# Altium PCB PCB1.PcbDoc (part 3 of 3)
Units mm, origin at the board's own origin, x right, y up, seen from the top; angles counter-clockwise.
Board outline 80 x 55 mm, 4 copper layers (Top Layer, Inner Layer 1, Inner Layer 2, Bottom Layer 1), stack 0.603 mm thick; 136 components, 94 nets, 499 pads, 245 vias.
Unrouted connection lines stored in the file: 1.
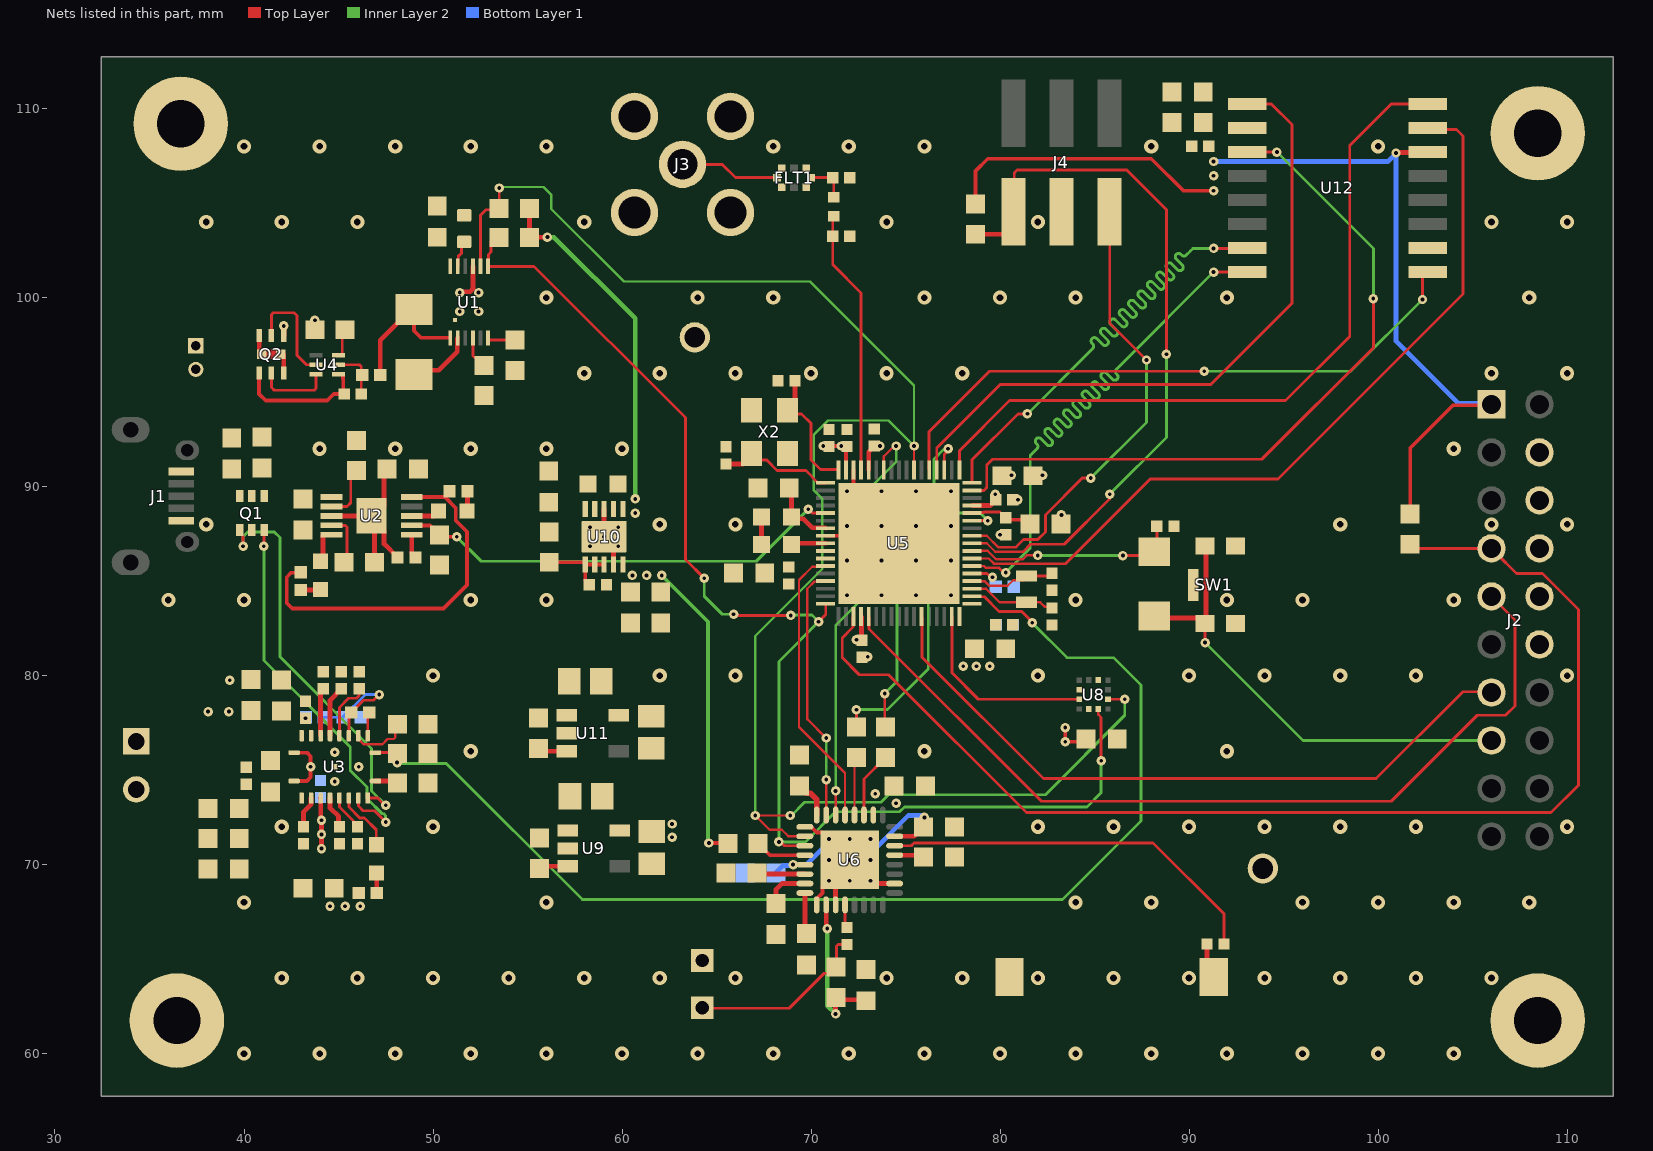
[diagram p4: the nets of this part, all layers, seen from the top]

## Part data (continued)
R22 R29: library part CMP-009-00149-12, "Chip Resistor, 10 kOhms, +/-1 %, 63 mW, -55 to 125 degC, 0402", Case/Package=0402, Max Operating Temperature=155°C, Min Operating Temperature=-55°C, Power=63mW, Tolerance=1%, Mfr. Part No.=CRCW040210K0FKTD, Pins=2
R24: library part CMP-009-00006-3, "SMD Resistor, Thick film 2.2 kOhm,  ±  1 %, 0603, CRCW06032K20FKEA, Vishay", Case Code (Imperial)=0603, Case Code (Metric)=1608, Max Operating Temperature=155°C, Max Power Dissipation=100mW, Min Operating Temperature=-55°C, Package Quantity=10, Resistance=2.2kR, Resistance Tolerance=1%, Resistor Type="Thick Film", Temperature Coefficient=100ppm/°C, Voltage Rating=75V, Case/Package=0603, Construction=Rectangular, Contact Plating=Tin, Depth=0.85mm, Features="Automotive AEC-Q200", Height=0.45mm, Lead Free="Lead Free", Length=1.55mm, Mfr. Part No.=CRCW06032K20FKEA, Military Standard=Not, Mount="Surface Mount", Number of Terminations=2, Packaging="Tape and Reel", Power Rating=100mW, Radiation Hardening=No, REACH SVHC=Unknown, RoHS Compliant=Yes, Series=CRCW, Size Code=0603, Technology="THICK FILM", Termination=SMD/SMT, Tolerance=1%, Voltage Rating (DC)=75V, Weight=7.1E-05oz, Width=0.033inch
R27: library part CMP-009-00191-7, "VISHAY - CRCW060320K0FKEA - SMD Chip Resistor, 0603 [1608 Metric], 20 kohm, CRCW e3 Series, 75 V, Thick Film, 100 mW", Case Code (Imperial)=0603, Case Code (Metric)=1608, Max Operating Temperature=155°C, Max Power Dissipation=100mW, Min Operating Temperature=-55°C, Package Quantity=5000, Resistance=20k, Resistance Tolerance=1%, Resistor Type="Thick Film", Temperature Coefficient=100ppm/°C, Voltage Rating=75V, Case/Package=0603, Construction=Rectangular, Contact Plating=Tin,Lead, Depth=0.85mm, Features="Automotive AEC-Q200", Height=0.45mm, Lead Free="Lead Free", Length=1.55mm, Military Standard=Not, Mount="Surface Mount", Number of Pins=2, Number of Terminations=2, Packaging="Tape and Reel", Power Rating=100mW, Radiation Hardening=No, REACH SVHC=Unknown, RoHS Compliant=Yes, Series=CRCW, Size Code=0603, Termination=SMD/SMT, Tolerance=1%, Voltage Rating (DC)=75V, Weight=7.1E-05oz, Width=0.85mm
ST1 ST2 ST3 ST4: library part CMP-00028-00004-1, "M2 PTH (2.5mm), 5mm pad", Pins=1
SW1: library part CMP-011-00013-2, "Switch Tactile N.O. SPST Button Gull Wing 0.05A 32VDC 1VA 150000Cycles 3N SMD T/R", Case/Package=SMD/SMT, Contact Current Rating=50mA, Contact Resistance=100mR, Insulation Resistance=1GR, Max Operating Temperature=85°C, Max Voltage Rating (DC)=32V, Min Operating Temperature=-40°C, Operating Force=3N, Package Quantity=7000, Power Rating=1W, Actuator Length=0.5mm, Actuator Type=Standard, Contact Material=Silver, Contact Plating=Silver, Current Rating=50mA, Depth=4.6mm, Illumination Type=Non-Illuminated,Illuminated, Lead Free="Lead Free", Length=4.6mm, Max Current Rating=50mA, Mechanical Life=150000Cycles, Mount="Surface Mount", Orientation=Straight, Packaging="Cut Tape", Radiation Hardening=No, REACH SVHC="No SVHC", Series=KMR2, Switch Function=Off-Mom, Switch Travel=0.25mm, Termination="Gull Wing", Throw Configuration=SPST, Voltage Rating (DC)=32V, Width=2.8mm
U1: library part CMP-019-00060-3, "IC BATT FUEL GAUGE LICOO2 12SON", Capacity=8000mAh, Max Operating Temperature=85°C, Max Supply Voltage=4.5V, Min Operating Temperature=-40°C, Min Supply Voltage=2.45V, Operating Supply Current=93uA, Output Current=500uA, Output Voltage=1.8V, Package Quantity=250, Contact Plating=Gold, Interface=I2C, Lead Free="Lead Free", Mount="Surface Mount", Number of Cells=1, Number of Pins=12, Packaging="Tape and Reel", REACH SVHC="No SVHC", RoHS Compliant=Yes
U2: library part CMP-019-00058-5, "Battery Charger Li-Ion/Li-Pol 1000mA 4.2V 10-Pin MSOP EP T/R", Case/Package=MSOP, Max Charge Current=1A, Max Operating Temperature=125°C, Max Output Voltage=4.23V, Max Supply Voltage=12V, Min Input Voltage=4.5V, Min Operating Temperature=-40°C, Min Output Voltage=4.16V, Min Supply Voltage=3.5V, Operating Supply Current=800uA, Operating Supply Voltage=6.5V, Output Voltage=4.2V, Package Quantity=1, Contact Plating=Gold, Height=0.95mm, Lead Free="Lead Free", Length=3.1mm, Max Output Current=1A, Mfr. Part No.=BQ24092DGQT, Number of Cells=1, Number of Pins=10, Output Current=1A, Packaging="Tape and Reel", Radiation Hardening=No, REACH SVHC="No SVHC", RoHS Compliant=Yes, Series=-, Width=3.1mm
U3: library part CMP-019-00057-4, "IC WIRELESS PWR RCVR 20QFN", Case/Package=VQFN, Max Operating Temperature=125°C, Min Operating Temperature=0°C, Operating Supply Current=8mA, Operating Supply Voltage=10V, Output Current=1.5A, Output Voltage=4.35V, Package Quantity=3000, Contact Plating=Gold, Lead Free="Lead Free", Logic Function=Receiver, Mount="Surface Mount", Packaging="Tape and Reel", RoHS Compliant=Yes, Series=BQ51051B
U4: library part CMP-019-00059-3, "IC LITHIUM BATT PROTECT 6WSON", Case/Package=WFDFN, Max Operating Temperature=85°C, Min Operating Temperature=-40°C, Operating Supply Voltage=28V, Contact Plating=Gold, Fault Protection="Over Current,Short Circuit,Over/Under Voltage", Lead Free="Lead Free", Mount="Surface Mount", Number of Cells=1, Number of Pins=6, Packaging="Tape and Reel", RoHS Compliant=Yes
U5: library part CMP-020-00023-6, "ARM Based Multiprotocol Wireless Microcontroller 32-Bit 1.71V to 3.6V 68-Pin 256KB VFQFPN Surface Mount", Case/Package=VFQFPN, Frequence=64MHz, Manufacturer=ST, Max Operating Temperature=85°C, Max Supply Voltage=3.6V, Min Operating Temperature=-40°C, Min Supply Voltage=1.71V, Flash size=256kB
U6: library part CMP-001-0002-4, "MAX9867 Series 1.8V I2C/Serial Ultra-Low Power Stereo Audio Codec - TQFN-32EP", Max Operating Temperature=85°C, Min Operating Temperature=-40°C, Operating Supply Voltage=1.8V, Package Quantity=60, Interface=I2C,Serial, Mfr. Part No.=MAX9867ETJ+G3U, Mount="Surface Mount", Number of D/A Converters=2, Number of Pins=32, Packaging=Rail/Tube, Resolution=18b, RoHS Compliant=Yes, Sampling Rate=48KS/s, Signal to Noise Ratio (SNR)=85dB, Type="General Purpose"
U7: library part CMP-00027-00002-3, "Microphones 2.2K OHM 9.7mm", Current Rating=500uA, Max Supply Voltage=1.5V, Max Supply Voltage (DC)=10V, Package Quantity=100, Depth=4.5mm, Diameter=9.7mm, Direction=Omnidirectional, Height=4.7mm, Impedance=2.2kR, Length=9.7mm, Mount=Wire, Nominal Supply Voltage (DC)=1.5V, Operating Supply Current=500uA, Output Impedance=2.2kR, Output Type=Analog, Packaging=Bulk, REACH SVHC="No SVHC", RoHS Compliant=Yes, Series=AOM, Shape=Circular,Round, Termination="PC Pins", Voltage Rating=10V, Width=9.7mm
U8: library part CMP-00002-2, "3-AXIS Iomt Accelerometer (1.6X1", Case/Package=VLGA-12, Manufacturer=MEMSIC, Acceleration="2g, 4g, 8g, 12g, 16g", Interface Type=I2C, Mfr. Part No.=MC3413, Sensing Axis=X,Y,Z, Type=Accelerometer
U9 U11: library part CMP-019-00061-2, "Automotive, 300-mA, low-IQ, high-PSRR, LDO voltage regulator with high accuracy and enable 5-SOT-23 -40 to 150", Case/Package=SOT-23, Dropout voltage=115mV, Manufacturer="Texas Instruments", Max Output Current=300mA, Output Voltage=1.8V, Mfr. Part No.=TPS78418QDBVRQ1
U10: library part CMP-019-00064-1, "TEXAS INSTRUMENTS         TPS63001DRCR             CONVERTER, BUCK-BOOST, SON-10, FULL REEL", Max Input Voltage=5.5V, Max Operating Temperature=85°C, Max Output Current=1.2A, Max Output Voltage=3.3V, Min Input Voltage=1.8V, Min Operating Temperature=-40°C, Package Quantity=1, Quiescent Current=30uA, Switching Frequency=1.5MHz, Contact Plating=Gold, Efficiency=96%, Lead Free="Lead Free", Mfr. Part No.=TPS63001DRCR, Min Output Voltage=3.3V, Nominal Output Voltage=3.3V, Number of Outputs=1, Number of Pins=10, Operating Supply Voltage=5.5V, Output Current=1.2A, Output Type=Fixed, Output Voltage=3.3V, Packaging="Tape and Reel", Radiation Hardening=No, REACH SVHC="No SVHC", Synchronous Rectifier=Yes, Topology=Buck-Boost, Weight=0.000921oz
U12: library part CMP-019-00062-1, "128-MBIT Cmos 3.0 Volt Flash Memory With 80MHZ Ddr Spi (ser", Case/Package=SOIC, Frequency=80MHz, Max Operating Temperature=105°C, Mfr. Part No.=S25FL128SDSMFV001, Min Operating Temperature=-40°C, Interface=SPI,Serial, Memory Type=FLASH,NOR, Packaging=Tray, RoHS Compliant=Yes
X1: library part CMP-003-00032-3, "CRYSTAL 32.7680KHZ 7PF SMD", Case/Package=SMD/SMT, ESR (Equivalent Series Resistance)=90kR, Frequency=32.768kHz, Frequency Stability=20ppm, Load Capacitance=7pF, Max Operating Temperature=85°C, Min Operating Temperature=-40°C, Package Quantity=3000, Frequency Tolerance=20ppm, Height=0.024inch, Lead Pitch=0.8mm, Length=0.079inch, Mount="Surface Mount", Number of Pins=2, Packaging="Tape and Reel", RoHS Compliant=Yes, Series=ECX-12, Termination=SMD/SMT, Width=0.047inch
X2: library part CMP-003-00031-3, "Crystal 32MHz ±7ppm (Tol) ±10ppm (Stability) 8pF FUND 40Ohm 4-Pin Mini-CSMD T/R", Case/Package=3.2x2.5x0.8mm, Freqeuncy Tolerance=10ppm, Frequency=32MHz, Load Capacitance=8pF, Manufaturer=ECS, Max Operating Temperature=-20°C, Min Operating Temperature=70°C, Tolerance=7ppm, Drive Level=200uW, ESR=40

## Via types
v1: diameter 0.75, hole 0.35, Top Layer to Bottom Layer 1, 116 vias
v2: diameter 0.5, hole 0.2, Top Layer to Bottom Layer 1, 95 vias
v3: diameter 0.5/0.5/0.5/0.5 (per signal layer), hole 0.2, Top Layer to Bottom Layer 1, 34 vias

## Nets (pads, with @x,y where several pads share a name; then routed paths per layer and width w, separated by ;. In a path a pad name is that pad's centre, name@x,y a point inside that pad or via, vN(x,y) a via of type N, cw(c..) or ccw(c..) an arc to the next point about the centre after c; other vN are vias at no path point)
1V8_A: C43.1 C44.1 C49.1 U6.5 U6.23 U9.5 | length 12.1
  Top Layer w0.2: v2(69.05,70) U6.5@69.675,70
  Top Layer w0.25: U6.23@74.425,71.5 75.45,71.5 75.9,71.95 C43.1@75.9,72 ; C43.1@75.95,72 76,72.05 v2(76,72.5)
  Bottom Layer 1 w0.25: C44.1@68.05,69.5 68.499,69.949 68.999,69.949 v2(69.05,70) 69.75,70 70.6,70.85 73.4,70.85 75.15,72.6 75.9,72.6 v2(76,72.5)
  other v3: 62.65,71.45 62.65,72.15
1V8_D: C42.1 C54.1 U6.32 U11.5 | length 2.1
  Top Layer w0.3: C42.1@69.55,74.25 69.55,74 69.775,73.775 69.975,73.775 70.3,73.45 U6.32@70.3,72.625
3V3_MCU: C19.1 C20.1 C21.1 C22.1 C23.1 C24.1 C25.1 C26.1 C28.1 C29.1 C30.1 C45.1 C47.1 C51.2 C52.2 C58.1 C59.1 C60.1 J2.1 R1.2 R2.2 R20.2 R21.2 R30.1 U5.1 U5.14 U5.30 U5.33 U5.44 U5.45 U5.55 U5.68 U6.26 U8.3 U10.1 U10.10 U12.2 U12.14 | length 94.9
  Top Layer w0.2: v2(64.595,71.144) 65.582,71.144 R20.2@65.6,71.126 ; v3(70.65,92.15) v3(71.6,92.15) C25.1@71.65,92.15 ; U5.33@71.85,90.875 C25.1@71.85,92.05 ; R30.1@78.65,104.9 R30.1@78.7,104.95 78.7,106.7 79.35,107.35 88,107.35 89.7,105.65 v3(91.3,105.65) ; v3(83.45,77.25) v3(83.45,76.5) 84.4,76.5 C47.1@84.5,76.6 ; R21.2@101.7,88.55 101.7,92.05 103.95,94.3 105.9,94.3 J2.1@105.95,94.35
  Top Layer w0.25: R1.2@55.1,104.721 55.1,103.2 v2(56.05,103.2) ; U5.55@72.65,83.125 72.675,83.1 72.675,81.875 C30.1@72.7,81.85 ; U5.30@73.05,90.875 73.05,91.85 C20.1@73.35,92.15 ; U5.14@78.525,89 79.475,89 C29.1@79.775,89.3 79.763,89.313 79.763,89.587 v3(79.75,89.6) ; v2(100.95,107.65) 100.977,107.677 102.577,107.677 U12.14@102.6,107.7
  Inner Layer 2 w0.2: v3(62.1,85.3) 64.55,82.85 64.55,71.189 v2(64.595,71.144)
  Inner Layer 2 w0.25: v2(56.05,103.2) 56.4,103.2 60.7,98.9 v3(60.7,89.35)
  Bottom Layer 1 w0.2: v3@91.25,105.65 v3(91.3,105.65)
  Bottom Layer 1 w0.25: v3(91.3,107.2) 100.5,107.2 v2(100.95,107.65) 100.95,97.7 104.25,94.4 J2.1@105.85,94.4
  other v3: 74.5,73.25 73.4,73.75 78.05,80.5 78.75,80.5 79.45,80.5 72.4,81.9 60.55,85.3 61.3,85.3 60.7,88.6 80.6,90.6 73.65,92.15 91.3,106.45
5V_IN: C1.1 Q1.4 U2.1
AC1: C7.1 C13.1 C15.1 C61.2 C62.2 C63.2 C64.1 C65.1 U3.2
AC2: C16.1 C17.1 C18.1 C64.2 C65.2 P2.1 U3.19
BAT: C2.1 C11.1 C12.1 C48.1 C50.2 C53.1 R5.1 R6.2 R7.2 R8.2 R17.2 R23.1 R25.1 U1.8 U2.10 U3.4 U9.1 U10.5 U11.1 | length 25.7
  Top Layer w0.2: R5.1@42.999,85.475 42.966,85.441 42.491,85.441 42.258,85.208 42.258,83.842 42.55,83.55 50.55,83.55 51.8,84.8 51.8,87.615 51.197,88.217 51.197,88.883 50.63,89.45 U2.10@48.95,89.45
  Top Layer w0.25: v2@44.05,72.3 44.055,72.305 44.055,73.52 U3.4@44.05,73.525 ; v2(44.1,70.85) 44.1,71.55 v2@44.15,71.6 ; v2(44.1,71.6) v2(44.1,72.35) ; R6.2@48.85,95.85 49.15,96.15 50.3,96.15 51.286,97.136 51.286,97.846 U1.8@51.311,97.871
  other v2: 44.55,67.8 45.35,67.8 46.15,67.8
BAT+: C4.1 P1.1 R6.1 R11.2 U1.6 U1.7 | length 7.3
  Top Layer w0.2: R6.1@49,99.3 49,98.25 49.379,97.871 U1.7@50.911,97.871
  Top Layer w0.25: R11.2@47.21,95.9 47.21,97.75 R6.1@48.76,99.3
  Top Layer w0.5: R6.1@48.76,99.3 R6.1@48.9,99.3
BAT-: C14.2 P1.2 Q2.4 U4.4 | length 7.2
  Top Layer w0.2: Q2.4@40.8,96 40.8,94.9 41.15,94.55 44.4,94.55 44.75,94.9 C14.2@45.25,94.9 ; U4.4@44.995,95.95 45.22,95.95 45.245,95.925 45.245,95.705 45.25,95.7 C14.2@45.25,94.9 ; C14.2@45.3,94.9 C14.2@45.25,94.9
BL_RF: C56.1 L4.1 U5.31 | length 14.1
  Top Layer w0.15: L4.1@71.2,104.35 71.15,104.3 C56.1@71.15,103.25 71.15,101.75 72.65,100.25 U5.31@72.65,90.875
BOOT1: C7.2 U3.3 | length 1.7
  Top Layer w0.25: C7.2@43.15,72 43.15,72.8 43.55,73.2 U3.3@43.55,73.525
BOOT2: C16.2 U3.17 | length 2.6
  Top Layer w0.25: U3.17@44.05,76.825 44.05,79.125 44.175,79.25 C16.2@44.25,79.25
CHG_CTRL: R27.2 U3.13 | length 3.2
  Top Layer w0.125: U3.13@46.05,76.825 46.05,76.645 46.333,76.362 47.312,76.362 47.6,76.65 47.927,76.65 48,76.723 R27.2@48,77.45 ; R27.2@48.125,77.425 R27.2@48.15,77.45
CHG_EN: R26.2 U3.11 U5.2 | length 63.4
  Top Layer w0.15: U3.11@46.95,75.925 47.975,75.925 R26.2@48.1,75.8 ; U5.2@78.525,84.2 78.55,84.175 79.175,84.175 79.95,83.4 81.15,83.4 81.7,82.85 v2(81.7,82.8)
  Inner Layer 2 w0.15: v2(48.1,75.4) 48.15,75.35 50.7,75.35 57.9,68.15 83.3,68.15 87.45,72.3 87.45,79.5 86,80.95 83.55,80.95 v2(81.7,82.8)
CHG_ON: DS3.2 U2.8 | length 1.5
  Top Layer w0.25: U2.8@48.875,88.45 50.05,88.45 DS3.2@50.3,88.7
CLMP1: C15.2 U3.5 | length 1.7
  Top Layer w0.25: U3.5@44.55,73.525 44.555,73.52 44.555,72.995 45,72.55 45,72.05 C15.2@45.051,72
CLMP2: C18.2 U3.16 | length 2.7
  Top Layer w0.25: U3.16@44.55,76.825 44.55,78.7 C18.2@45.151,79.3
CODEC_INTN: R20.1 U6.4 | length 2.8
  Top Layer w0.2: R20.1@67.15,71.2 67.15,71.176 R20.1@67.2,71.126 67.826,70.5 U6.4@69.675,70.5
COM1: C13.2 U3.6 | length 1.9
  Top Layer w0.15: U3.6@45.05,73.525 45.055,73.52 45.055,73.045 45.826,72.274 45.826,72.074 C13.2@45.9,72
COM2: C17.2 U3.15 | length 3.2
  Top Layer w0.15: U3.15@45.05,76.825 45.05,78.323 45.528,78.8 45.95,78.8 46.1,78.95 C17.2@46.101,79.3 C17.2@46.15,79.35
COUT: Q2.2 U4.2 | length 5.9
  Top Layer w0.15: Q2.2@41.45,98 41.45,99.1 41.55,99.2 42.65,99.2 42.8,99.05 42.8,96.95 43.3,96.45 U4.2@43.805,96.45
DOUT: Q2.5 U4.3 | length 4
  Top Layer w0.15: Q2.5@41.45,96 41.45,95.25 41.6,95.1 43.717,95.1 43.805,95.188 U4.3@43.805,95.95
GND: C1.2 C2.2 C3.2 C4.2 C5.1 C6.2 C8.1 C9.1 C10.2 C11.2 C12.2 C19.2 C20.2 C21.2 C22.2 C23.2 C24.2 C25.2 C26.2 C27.2 C28.2 C29.2 C30.2 C31.2 C32.2 C33.2 C34.2 C35.2 C36.2 C38.1 C39.1 C40.2 C42.2 C43.2 C44.2 C45.2 C46.2 C47.2 C48.2 C49.2 C50.1 C51.1 C52.1 C53.2 C54.2 C55.2 C56.2 C57.2 C58.2 C59.2 C60.2 C66.2 C67.2 FLT1.1 FLT1.3 FLT1.5 FLT1.7 J1.5 J2.4 J2.6 J2.8 J2.10 J2.12 J3.2 J3.3 J3.4 J3.5 J4.3 J5.1 J6.1 LS1.2 Q2.1 R3.2 R4.2 R9.1 R10.1 R14.1 R15.1 R16.1 R22.1 R26.1 R27.1 R28.1 R29.2 ST1.1 ST2.1 ST3.1 ST4.1 SW1.3 SW1.4 SW1.5 U1.3 U1.13 U2.3 U2.11 U3.1 U3.20 U3.21 U5.32 U5.42 U5.69 U6.1 U6.9 U6.11 U6.18 U6.33 U7.2 U8.6 U8.9 U9.2 U10.3 U10.9 U10.11 U11.2 U12.10 X2.2 X2.4 | length 26.2
  Top Layer w0.2: U3.1@42.65,74.425 43.325,74.425 43.525,74.625 43.525,75.225 v2@43.55,75.25 ; U3.20@42.65,75.925 43.333,75.925 43.525,75.733 43.525,75.275 v2@43.5,75.25 ; U6.1@69.675,72 70.002,72 70.302,71.7 70.6,71.7 v2(70.95,71.35) U6.33@70.95,71.3 ; U6.9@70.3,67.875 70.3,68.202 70.6,68.502 70.6,68.85 U6.33@70.95,69.2 ; U5.42@70.775,87.4 71.55,87.4 71.85,87.7 U5.69@71.85,87.85 ; U5.69@71.95,89.85 72,89.85 72.25,90.1 U5.32@72.25,90.875
  Top Layer w0.25: U2.3@44.625,88.45 46.5,88.45 U2.11@46.6,88.35 ; U2.11@46.7,88.35 46.9,88.15 R10.1@46.9,86 ; U2.11@46.85,88.4 47.41,88.96 47.41,90.76 C2.2@47.575,90.925 ; U2.11@46.95,88.15 47.41,87.69 47.41,86.965 R29.2@48.125,86.25 ; v2@51.4,100.2 51.514,100.314 51.964,100.314 52.111,100.461 U1.3@52.111,101.661 ; v2(59.05,87.35) U10.3@59.05,88.825 ; U10.9@59.55,85.875 59.55,86.65 U10.11@59.75,86.85 ; U6.33@70.975,69.15 71.3,68.825 U6.11@71.3,67.875 ; v2(73.15,69.15) 73.3,69 U6.18@74.425,69
  Top Layer w0.3: Q2.1@42.1,97.995 v3(42.1,98.5)
  other v1: 40,60 44,60 48,60 52,60 56,60 60,60 64,60 68,60 72,60 76,60 80,60 84,60 88,60 92,60 96,60 100,60 104,60 42,64 46,64 50,64 54,64 58,64 62,64 66,64 74,64 78,64 82,64 86,64 90,64 94,64 98,64 102,64 106,64 40,68 56,68 84,68 88,68 96,68 100,68 104,68 108,68 42,72 50,72 82,72 86,72 90,72 94,72 98,72 102,72 110,72 52,76 76,76 92,76 50,80 62,80 66,80 82,80 90,80 94,80 98,80 102,80 110,80 36,84 40,84 52,84 56,84 84,84 92,84 96,84 104,84 38,88 62,88 66,88 98,88 106,88 110,88 44,92 48,92 52,92 56,92 60,92 104,92 58,96 62,96 66,96 70,96 74,96 78,96 106,96 110,96 56,100 64,100 68,100 76,100 80,100 84,100 92,100 108,100 38,104 42,104 46,104 58,104 74,104 82,104 106,104 110,104 40,108 44,108 48,108 52,108 56,108 68,108 72,108 76,108 88,108 100,108
  other v2: 70.95,69.15 72.05,69.15 70.95,70.25 72.05,70.25 73.15,70.25 72.05,71.35 73.15,71.35 44.8,74.4 43.525,75.175 46.075,75.175 44.8,75.95 71.9,84.25 73.73,84.25 75.56,84.25 77.4,84.25 71.9,86.09 73.73,86.09 75.56,86.09 77.4,86.09 58.3,86.85 59.8,86.85 58.3,87.85 59.8,87.85 71.9,87.92 73.73,87.92 75.56,87.92 77.4,87.92 71.9,89.75 73.73,89.75 75.56,89.75 77.4,89.75 51.411,99.266 52.411,99.266 51.411,100.266 52.411,100.266
  other v3: 38.1,78.1 39.2,78.1 39.25,79.75 73,81 80,87.45 83.25,88.5 80.95,89.3 82.25,90.6 43.75,98.8
I2S_BCLK: U5.28 U6.30 | length 22.3
  Top Layer w0.125: U6.30@71.3,72.75 v2(71.3,73.9) ; U5.28@73.85,90.875 73.85,91.6 74.4,92.15 v3(74.5,92.15)
  Inner Layer 2 w0.125: v2(71.3,73.9) 71.3,82.65 72.65,84 72.65,89.45 74.5,91.3 v3(74.5,92.15)
I2S_LRCK: U5.46 U6.29 | length 15.4
  Top Layer w0.125: U5.46@71.05,85.8 71.012,85.763 70.063,85.763 69.362,85.062 69.362,77.288 71.8,74.85 U6.29@71.8,72.625
I2S_MCLK: U5.48 U6.31 | length 13.6
  Top Layer w0.125: U6.31@70.8,72.625 v2(70.8,74.5) ; v2(70.8,76.7) 69.8,77.7 69.8,84.6 70.18,84.98 70.78,84.98 U5.48@70.8,85
  Inner Layer 2 w0.125: v2(70.8,76.7) 70.8,74.55 v2@70.85,74.5
I2S_SDIN: R18.2 U6.28 | length 3.1
  Top Layer w0.125: U6.28@72.3,72.625 72.3,75.55 R18.2@72.4,75.65
I2S_SDOUT: R19.1 U6.27 | length 3.5
  Top Layer w0.15: U6.27@72.8,72.625 72.8,74.526 73.9,75.626 R19.1@73.9,75.65
ISET2: R28.2 U2.7 U5.39 | length 23.9
  Top Layer w0.15: v2(69.85,88.8) 70.05,88.6 U5.39@70.775,88.6
  Top Layer w0.2: U2.7@48.875,87.95 49.85,87.95 R28.2@50.35,87.45 ; R28.2@50.35,87.4 50.4,87.35 v2(51.25,87.35)
  Inner Layer 2 w0.15: v2(51.25,87.35) 52.55,86.05 67.1,86.05 v2(69.85,88.8)
MCU_RST: D1.2 J2.15 SW1.1 SW1.2 | length 25.4
  Top Layer w0.15: v2(90.85,81.75) SW1.1@90.85,82.75
  Top Layer w0.25: D1.2@88,83.05 90.55,83.05 SW1.1@90.85,82.75 ; SW1.2@90.85,86.85 90.9,86.8 SW1.1@90.9,82.75
  Inner Layer 2 w0.15: v2(90.85,81.75) 96.03,76.57 J2.15@106,76.57
MIC_BIAS: C46.1 R24.2 U6.10 | length 8.3
  Top Layer w0.25: U6.10@70.8,67.875 70.8,66.75 70.9,66.65 70.867,66.617 v2(70.86,66.617) ; v2(71.3,62.1) 71.3,62.9 R24.2@71.35,62.95 ; R24.2@71.45,62.85 C46.1@72.85,62.85
  Inner Layer 2 w0.25: v2(70.86,66.617) 70.86,62.54 v2(71.3,62.1)
MICL_P: C41.2 U6.12 | length 1.2
  Top Layer w0.15: U6.12@71.8,67.875 71.8,66.7 C41.2@71.85,66.65
NetC3_1: C3.1 U1.5 | length 1.5
  Top Layer w0.15: U1.5@51.311,101.661 51.336,101.686 51.336,102.186 51.5,102.35 51.5,102.9 C3.1@51.6,103
NetC5_2: C5.2 C6.1 J1.1 Q1.1 Q1.2 Q1.5 Q1.6 U3.9 | length 21.2
  Top Layer w0.15: Q1.1@39.85,87.75 39.85,87.493 39.95,87.393 v2(39.95,86.85) ; U3.9@46.55,73.525 47.075,73.525 47.15,73.45 47.456,73.144 v2(47.497,73.144)
  Inner Layer 2 w0.15: v2(39.95,86.85) 39.95,87.35 40.2,87.6 41.6,87.6 41.9,87.3 41.9,81 46.75,76.15 46.75,73.891 v2(47.497,73.144)
NetC8_2: C8.2 C9.2 C10.1 R13.2 U3.18
  other v2: 43.25,77.75
NetC14_1: C14.1 R11.1 U4.5 | length 2.8
  Top Layer w0.15: U4.5@44.995,96.45 46.1,96.45 46.2,96.35 R11.1@46.2,95.85 ; C14.1@46.2,94.9 R11.1@46.2,95.85 ; R11.1@46.25,95.9 R11.1@46.2,95.85
NetC27_1: C27.1 L2.1 U5.41 | length 3.5
  Top Layer w0.25: C27.1@68.85,89.9 68.965,89.785 L2.1@68.965,88.4 ; L2.1@69,88.3 69.6,88.3 70.075,87.825 70.75,87.825 U5.41@70.775,87.8
NetC34_1: C34.1 U6.6 | length 2.5
  Top Layer w0.2: C34.1@67.2,69.55 C34.1@67.25,69.5
  Top Layer w0.25: C34.1@67.25,69.5 U6.6@69.675,69.5
NetC35_1: C35.1 U6.7 | length 2.4
  Top Layer w0.25: C35.1@68.15,67.9 68.15,68.7 68.45,69 U6.7@69.675,69
NetC36_1: C36.1 U6.8 | length 2.2
  Top Layer w0.25: U6.8@69.675,68.5 69.675,66.375 C36.1@69.7,66.35
NetC37_1: C37.1 U6.22 | length 20.7
  Top Layer w0.15: U6.22@74.425,71 75.303,71 75.453,71.15 88.1,71.15 91.85,67.4 C37.1@91.85,65.75
NetC37_2: C37.2 LS1.1 | length 2.1
  Top Layer w0.25: C37.2@90.95,65.8 90.95,64.2 LS1.1@91.3,63.85
NetC40_1: C40.1 U6.21 | length 1.6
  Top Layer w0.25: U6.21@74.425,70.5 75.85,70.5 C40.1@76,70.35
NetC41_1: C41.1 R24.1 U7.1 | length 9.9
  Top Layer w0.15: U7.1@64.1,62.4 68.85,62.4 70.7,64.25 71.001,64.25 R24.1@71.325,64.574 ; R24.1@71.3,64.5 71.35,64.55 71.35,65.687 71.438,65.775 C41.1@71.9,65.775
NetC55_1: C55.1 R17.1 U10.6 U10.7 U10.8 | length 4
  Top Layer w0.2: R17.1@56.15,86 U10.6@58.05,86 ; U10.6@58.07,85.855 58.05,85.835 58.05,85.024 58.25,84.824 C55.1@58.25,84.8 ; U10.6@58.09,85.875 U10.7@58.55,85.875 ; U10.7@58.6,85.85 58.625,85.875 U10.8@59.05,85.875
NetC57_1: C57.1 FLT1.8 L4.2 | length 2.3
  Top Layer w0.15: FLT1.8@69.95,106.35 FLT1.8@70,106.35 C57.1@71.15,106.35 ; L4.2@71.2,105.3 C57.1@71.2,106.4
NetC61_1: C61.1 C62.1 C63.1 P2.2
NetC66_1: C66.1 U5.35 X2.1 | length 6.1
  Top Layer w0.15: X2.1@66.9,91.601 67.101,91.4 67.653,91.4 68.203,90.85 69.725,90.85 70.375,90.2 U5.35@70.775,90.2
  Top Layer w0.25: C66.1@65.5,91.201 66.4,91.201 66.85,91.651 X2.1@66.85,91.751
NetC67_1: C67.1 U5.34 X2.3 | length 6.8
  Top Layer w0.15: X2.3@68.75,94.051 68.951,93.85 69.5,93.85 70,93.35 70,91.4 70.5,90.9 U5.34@71.45,90.9
  Top Layer w0.25: X2.3@68.687,94.113 69.15,94.576 C67.1@69.15,95.601
NetDS1_1: DS1.1 R5.2 | length 1.1
  Top Layer w0.25: R5.2@43,84.55 43.025,84.525 44.022,84.525 DS1.1@44.049,84.553
NetDS1_2: DS1.2 U2.5 | length 1.8
  Top Layer w0.25: DS1.2@44.15,86.05 44.175,86.075 44.175,87.425 44.2,87.45 U2.5@44.625,87.45
NetDS2_1: DS2.1 R7.1 | length 1.2
  Top Layer w0.25: DS2.1@47.001,69.55 47.025,69.526 R7.1@47.025,68.499 47.025,68.425 R7.1@47.05,68.4
NetDS3_1: DS3.1 R8.1 | length 1.1
  Top Layer w0.25: DS3.1@51.797,88.7 51.825,88.728 51.825,89.725 R8.1@51.8,89.75
NetFLT1_4: FLT1.4 J3.1 | length 5.3
  Top Layer w0.15: J3.1@63.2,107.05 65.3,107.05 66,106.35 FLT1.4@68.2,106.35
NetL1_1: L1.1 L2.2 | length 1.5
  Top Layer w0.25: L1.1@67.385,86.95 67.385,88.385 L2.2@67.4,88.4
NetL1_2: L1.2 U5.43 | length 1.8
  Top Layer w0.25: L1.2@68.95,87 U5.43@70.775,87
NetL3_1: L3.1 U10.4
NetL3_2: L3.2 U10.2
NetQ1_3: Q1.3 U3.8 | length 20.5
  Top Layer w0.15: v2(41.05,86.85) 41.059,86.859 41.059,87.741 Q1.3@41.05,87.75 ; U3.8@46.05,73.525 46.05,73.1 46.3,72.85 46.9,72.85 v2(47.5,72.25)
  Inner Layer 2 w0.15: v2(41.05,86.85) 41.05,80.8 45.625,76.225 45.625,74.988 46.5,74.113 46.5,73.505 47.31,72.694 47.397,72.694 47.485,72.606 47.485,72.265 v2(47.5,72.25)
NetQ2_3: Q2.3 Q2.6 Q2.7 Q2.8 | length 2.9
  Top Layer w0.25: Q2.3@40.8,97.995 40.8,97.15 Q2.8@40.9,97.05 ; Q2.6@42.1,96.005 Q2.7@42.1,97
  Top Layer w0.5: Q2.8@41.05,97 Q2.7@41.95,97
NetR3_1: R3.1 U1.12 | length 1.5
  Top Layer w0.15: U1.12@52.911,97.871 52.911,97.775 52.936,97.75 R3.1@54.3,97.75
NetR4_1: R4.1 U1.10 | length 1.7
  Top Layer w0.15: U1.10@52.111,97.871 52.111,96.923 52.198,96.836 52.314,96.836 R4.1@52.7,96.45
NetR9_2: R9.2 U2.2 | length 3
  Top Layer w0.15: U2.2@44.625,88.95 45.45,88.95 45.65,89.15 45.65,90.7 R9.2@45.9,90.95
NetR10_2: R10.2 U2.4 | length 2.7
  Top Layer w0.15: U2.4@44.625,87.95 45.362,87.95 45.45,87.862 45.45,86.05 R10.2@45.4,86
NetR12_1: R12.1 U3.12 | length 1.3
  Top Layer w0.15: U3.12@46.55,76.825 46.55,77.95 R12.1@46.65,78.05
NetR12_2: R12.2 R13.1 R16.2 U3.14 | length 6.6
  Top Layer w0.15: U3.14@45.55,76.825 45.55,77.9 R12.2@45.7,78.05 ; R12.2@45.675,78.05 46.325,78.7 46.85,78.7 v2(47.15,79)
  Bottom Layer 1 w0.15: R13.1@44.2,77.8 R13.1@44.225,77.8 R16.2@45.225,77.8 ; R16.2@45.25,77.8 45.25,77.825 46.425,79 v2(47.15,79)
NetR14_2: R14.2 U4.6 | length 1.6
  Top Layer w0.15: U4.6@44.995,96.95 45.15,96.95 45.2,97 R14.2@45.2,98.4
NetR15_2: R15.2 U3.10 | length 1.2
  Top Layer w0.25: U3.10@46.95,74.425 48.075,74.425 R15.2@48.1,74.4
NetR18_1: R18.1 U5.12 | length 17.4
  Top Layer w0.15: R18.1@72.4,77.275 v2(72.4,78.2) ; U5.12@78.5,88.2 U5.12@78.525,88.2 v2(79.35,88.2)
  Inner Layer 2 w0.15: v2(72.4,78.2) 74.05,78.2 76.2,80.35 76.2,87.45 77.35,88.6 78.95,88.6 v2(79.35,88.2)
NetR19_2: R19.2 U5.20 | length 17.4
  Top Layer w0.15: v2(73.9,79.05) 73.9,77.326 R19.2@73.95,77.276 ; U5.20@77.05,90.95 77.05,91.705 77.25,91.905 v2(77.25,92)
  Inner Layer 2 w0.15: v2(73.9,79.05) 74.55,79.7 74.55,87.546 76.5,89.496 76.5,91.45 76.983,91.933 77.183,91.933 v2(77.25,92)
NetR22_2: R22.2 U5.5 | length 1.2
  Top Layer w0.15: U5.5@78.525,85.4 79.305,85.4 79.505,85.2 v2(79.6,85.2) v2@79.65,85.2
NetR23_2: R23.2 U9.3 | length 1.5
  Top Layer w0.25: R23.2@55.65,69.8 55.759,69.909 U9.3@57.129,69.909
NetR25_2: R25.2 U11.3 | length 1.6
  Top Layer w0.25: R25.2@55.55,76.2 55.75,76 U11.3@57.075,76
NetR29_1: R29.1 U2.6 | length 1.3
  Top Layer w0.25: U2.6@48.875,87.45 48.875,86.45 48.9,86.425 R29.1@48.9,86.2
NRST: C33.1 D1.1 U5.8 | length 11.5
  Top Layer w0.125: U5.8@78.525,86.6 79.35,86.6 79.8,86.15 81.2,86.15 81.413,86.363 v2(82,86.363)
  Top Layer w0.15: v2(86.5,86.35) 88.15,86.35 D1.1@88.225,86.425 ; D1.1@88.15,86.5 88.3,86.65 C33.1@88.3,87.91
  Inner Layer 2 w0.15: v2(82,86.363) 86.487,86.363 v2(86.5,86.35)
OSC_IN: C38.2 U5.3 X1.1 | length 4.6
  Top Layer w0.125: U5.3@78.6,84.6 79.263,84.6 79.988,83.875 X1.1@81.4,83.875 82.125,83.875 82.35,83.65 82.7,83.65 C38.2@82.75,83.6
OSC_OUT: C39.2 U5.4 X1.2 | length 4.4
  Top Layer w0.125: U5.4@78.525,85 79.181,85 79.419,84.762 80.412,84.762 80.7,85.05 X1.2@81.25,85.05
  Top Layer w0.15: X1.2@81.4,85.275 82.725,85.275 C39.2@82.8,85.35
QSPI_IO0: U5.7 U12.15 | length 42.3
  Top Layer w0.125: U5.7@78.525,86.2 79.4,86.2 79.675,85.925 83.475,85.925
  Top Layer w0.15: 83.475,85.925 87.95,90.4 94.7,90.4 104.5,100.2 104.5,108.55 104.15,108.9 U12.15@102.7,108.9
QSPI_IO1: U5.6 U12.8 | length 34.5
  Top Layer w0.125: U5.6@78.525,85.8 79.15,85.8 79.251,85.699 79.95,85.699 80.249,85.4 v2@80.35,85.4
  Top Layer w0.15: v2(91.3,101.35) 93,101.35 U12.8@93.05,101.4
  Inner Layer 2 w0.15: v2(80.3,85.45) 81.6,86.75 81.6,91.65 81.9,91.95 81.953,92.003 ccw(c81.829,92.127) 81.953,92.251 81.918,92.286 cw(c82.041,92.41) 81.918,92.533 cw(c82.041,92.41) 82.165,92.533 82.483,92.215 ccw(c82.607,92.339) 82.731,92.215 ccw(c82.607,92.339) 82.731,92.463 82.413,92.781 cw(c82.536,92.905) 82.413,93.028 cw(c82.536,92.905) 82.66,93.028 82.978,92.71 ccw(c83.102,92.834) 83.226,92.71 ccw(c83.102,92.834) 83.226,92.958 82.908,93.276 cw(c83.031,93.4) 82.908,93.523 cw(c83.031,93.4) 83.155,93.523 83.473,93.205 ccw(c83.597,93.329) 83.721,93.205 ccw(c83.597,93.329) 83.721,93.453 83.403,93.771 cw(c83.526,93.895) 83.403,94.018 cw(c83.526,93.895) 83.65,94.018 83.968,93.7 ccw(c84.092,93.824) 84.216,93.7 ccw(c84.092,93.824) 84.216,93.948 83.898,94.266 cw(c84.021,94.39) 83.898,94.513 cw(c84.021,94.39) 84.145,94.513 84.463,94.195 ccw(c84.587,94.319) 84.711,94.195 ccw(c84.587,94.319) 84.711,94.443 84.393,94.761 cw(c84.516,94.884) 84.393,95.008 cw(c84.516,94.884) 84.64,95.008 84.958,94.69 ccw(c85.082,94.814) 85.206,94.69 ccw(c85.082,94.814) 85.206,94.938 84.888,95.256 cw(c85.011,95.379) 84.888,95.503 cw(c85.011,95.379) 85.135,95.503 85.453,95.185 ccw(c85.577,95.309) 85.701,95.185 ccw(c85.577,95.309) 85.701,95.432 85.382,95.751 cw(c85.506,95.874) 85.382,95.998 cw(c85.506,95.874) 85.63,95.998 85.948,95.68 ccw(c86.072,95.804) 86.196,95.68 ccw(c86.072,95.804) 86.196,95.927 86.16,95.963 cw(c86.284,96.087) 86.16,96.21 86.475,96.525 v2(91.3,101.35)
QSPI_IO2: U5.22 U12.9 | length 32.5
  Top Layer w0.15: U5.22@76.25,90.875 76.25,92.9 79.45,96.1 v2(90.8,96.1) ; v2(102.35,99.9) 102.35,101.35 U12.9@102.4,101.4
  Inner Layer 2 w0.15: v2(90.8,96.1) 98.55,96.1 v2(102.35,99.9)
QSPI_IO3: U5.21 U12.1 | length 35.6
  Top Layer w0.15: U5.21@76.65,90.875 76.65,92.036 80.014,95.4 91.15,95.4 95.45,99.7 95.45,109.15 94.35,110.25 U12.1@92.85,110.25
QSPI_NCS: U5.17 U12.7 | length 32.6
  Top Layer w0.15: U5.17@78.525,90.2 78.525,91.425 80.95,93.85 v2(81.45,93.85) ; v2(91.3,102.6) U12.7@93.1,102.6
  Inner Layer 2 w0.15: v2(81.45,93.85) 84.85,97.25 84.903,97.303 ccw(c84.779,97.427) 84.903,97.551 84.868,97.586 cw(c84.991,97.71) 84.868,97.833 cw(c84.991,97.71) 85.115,97.833 85.433,97.515 ccw(c85.557,97.639) 85.681,97.515 ccw(c85.557,97.639) 85.681,97.763 85.363,98.081 cw(c85.486,98.205) 85.363,98.328 cw(c85.486,98.205) 85.61,98.328 85.928,98.01 ccw(c86.052,98.134) 86.176,98.01 ccw(c86.052,98.134) 86.176,98.258 85.858,98.576 cw(c85.981,98.7) 85.858,98.823 cw(c85.981,98.7) 86.105,98.823 86.423,98.505 ccw(c86.547,98.629) 86.671,98.505 ccw(c86.547,98.629) 86.671,98.753 86.353,99.071 cw(c86.476,99.195) 86.353,99.318 cw(c86.476,99.195) 86.6,99.318 86.918,99 ccw(c87.042,99.124) 87.166,99 ccw(c87.042,99.124) 87.166,99.248 86.848,99.566 cw(c86.971,99.69) 86.848,99.813 cw(c86.971,99.69) 87.095,99.813 87.413,99.495 ccw(c87.537,99.619) 87.661,99.495 ccw(c87.537,99.619) 87.661,99.743 87.343,100.061 cw(c87.466,100.184) 87.343,100.308 cw(c87.466,100.184) 87.59,100.308 87.908,99.99 ccw(c88.032,100.114) 88.156,99.99 ccw(c88.032,100.114) 88.156,100.238 87.838,100.556 cw(c87.961,100.679) 87.838,100.803 cw(c87.961,100.679) 88.085,100.803 88.403,100.485 ccw(c88.527,100.609) 88.651,100.485 ccw(c88.527,100.609) 88.651,100.732 88.332,101.051 cw(c88.456,101.174) 88.332,101.298 cw(c88.456,101.174) 88.58,101.298 88.898,100.98 ccw(c89.022,101.104) 89.146,100.98 ccw(c89.022,101.104) 89.146,101.227 88.827,101.546 cw(c88.951,101.669) 88.827,101.793 cw(c88.951,101.669) 89.075,101.793 89.393,101.475 ccw(c89.517,101.599) 89.641,101.475 ccw(c89.517,101.599) 89.641,101.722 89.322,102.041 cw(c89.446,102.164) 89.322,102.288 cw(c89.446,102.164) 89.57,102.288 89.605,102.253 ccw(c89.729,102.377) 89.853,102.253 90.075,102.475 90.2,102.6 v2(91.3,102.6)
QSPI_RST: U5.16 U12.3 | length 39.3
  Top Layer w0.15: U5.16@78.525,89.8 79.15,89.8 79.3,89.95 79.3,91.15 79.6,91.45 93.85,91.45 99.75,97.35 v2(99.75,99.95) ; U12.3@92.85,107.75 92.9,107.7 v2(94.65,107.7)
  Inner Layer 2 w0.15: v2(94.65,107.7) 99.75,102.6 v2(99.75,99.95)
QSPI_SCK: U5.18 U12.16 | length 39
  Top Layer w0.15: U5.18@77.85,90.875 77.85,91.9 80.5,94.55 95.1,94.55 98.5,97.95 98.5,108.05 100.7,110.25 U12.16@102.35,110.25
SCL: R1.1 U1.2 U5.24 U6.2 U8.12 | length 90.9
  Top Layer w0.125: v2(53.5,105.8) 53.5,104.7 R1.1@53.55,104.65 ; v2(68.9,72.6) v2(67.05,72.6) 67.8,71.85 68.45,71.85 68.8,71.5 U6.2@69.7,71.5 ; U5.24@75.45,90.875 v2(75.45,92.15) ; U8.12@85.65,78.75 U8.12@85.713,78.75 v2(86.6,78.75)
  Top Layer w0.15: U1.2@52.511,101.661 52.511,104.361 52.8,104.65 R1.1@53.55,104.65
  Inner Layer 2 w0.125: v2(53.5,105.8) 53.55,105.8 53.6,105.85 55.85,105.85 56.25,105.45 56.25,104.7 60.1,100.85 69.95,100.85 75.45,95.35 v2(75.45,92.15) 74.1,93.5 70.9,93.5 70.152,92.752 70.152,89.798 70.6,89.35 70.6,85.65 67.05,82.1 v2(67.05,72.6)
  Inner Layer 2 w0.15: v2(68.9,72.6) 68.963,72.6 69.663,73.3 73.7,73.3 74.1,73.7 82.4,73.7 86.6,77.9 v2(86.6,78.75)
SDA: R2.1 U1.1 U5.51 U6.3 U8.2 | length 69.9
  Top Layer w0.15: U1.1@52.9,101.65 55.35,101.65 63.35,93.65 63.35,86.15 v2(64.35,85.15) ; U1.1@52.911,101.661 52.936,101.686 52.936,102.286 53.075,102.425 53.075,102.975 R2.1@53.35,103.25 ; v2(65.9,83.25) 65.966,83.184 v2(68.925,83.184) ; v2(68.3,71.2) 68.395,71.2 68.595,71 U6.3@69.8,71 ; v2(70.4,82.85) 70.775,83.225 U5.51@70.775,83.8 ; U8.2@85.2,78.237 85.2,77.937 85.35,77.787 v2(85.35,75.5)
  Inner Layer 2 w0.15: v2(64.35,85.15) 64.35,84.2 65.3,83.25 v2(65.9,83.25) ; v2(68.925,83.184) 68.941,83.2 70.05,83.2 v2(70.4,82.85) 68.3,80.75 v2(68.3,71.2) 69.7,71.2 71.3,72.8 74.686,72.8 74.936,73.05 84.6,73.05 85.35,73.8 v2(85.35,75.5)
SENS_INTN: U5.67 U8.5 | length 10.3
  Top Layer w0.15: U5.67@77.45,83.125 77.45,80.15 78.85,78.75 U8.5@84.187,78.75 U8.5@84.2,78.75
SWCLK: J2.9 U5.56 | length 46.9
  Top Layer w0.15: U5.56@73.05,83.125 73.075,83.1 73.075,82.475 82.2,73.35 100.7,73.35 105.25,77.9 106.75,77.9 107.25,78.4 107.25,82.94 J2.9@106.05,84.14
SWDIO: J2.7 R21.1 U5.54 | length 64.7
  Top Layer w0.15: U5.54@72.25,83.125 72.225,83.1 72.225,82.575 71.65,82 71.65,80.95 72.55,80.05 74.1,80.05 81.4,72.75 109.15,72.75 110.6,74.2 110.6,83.5 108.7,85.4 107.33,85.4 106.23,86.5 J2.7@106.05,86.5 ; R21.1@101.7,86.95 101.92,86.73 105.82,86.73 J2.7@105.85,86.7
SWO: J2.13 U5.63 | length 37.1
  Top Layer w0.15: U5.63@75.85,83.125 75.875,83.1 75.875,80.975 82.3,74.55 99.9,74.55 104.5,79.15 J2.13@106.2,79.15
UART_RX: J4.1 R30.2 U5.9 | length 37.7
  Top Layer w0.125: U5.9@78.525,87 79.3,87 79.75,86.55 81.209,86.55
  Top Layer w0.15: J4.1@80.8,105.15 80.75,105.2 80.75,106.6 80.9,106.75 86.7,106.75 88.8,104.65 v2(88.8,97) ; 81.209,86.55 81.609,86.95 83.398,86.95 85.8,89.352 v2(85.8,89.6)
  Top Layer w0.25: R30.2@78.7,103.35 80.75,103.35 J4.1@80.8,103.3
  Inner Layer 2 w0.15: v2(85.8,89.6) 88.8,92.6 v2(88.8,97)
UART_TX: J4.5 U5.10 | length 24.4
  Top Layer w0.125: U5.10@78.525,87.4 79.3,87.4 79.9,86.8 80.85,86.8
  Top Layer w0.15: 80.85,86.8 81.25,87.2 81.998,87.2 82.4,87.602 82.4,88.5 84.35,90.45 v2(84.8,90.45) ; J4.5@85.8,104.3 85.8,98.65 v2(87.75,96.7)
  Inner Layer 2 w0.15: v2(84.8,90.45) 87.75,93.4 v2(87.75,96.7)
VREF: C31.1 C32.1 U5.13 | length 3.3
  Top Layer w0.15: U5.13@78.525,88.6 78.55,88.625 79.139,88.625 79.164,88.65 80,88.65 C31.1@80.3,88.35
  Top Layer w0.2: C31.1@80.3,88.25 81.35,88.25 C32.1@81.575,88.025
WRL_CHG: DS2.2 U3.7 | length 3.3
  Top Layer w0.15: U3.7@45.55,73.525 45.55,73.05 46.125,72.475 46.373,72.475 47,71.848 DS2.2@47,70.95
pads on no net: FLT1.2 FLT1.6 J1.2 J1.3 J1.4 J1.6 J1.7 J1.8 J1.9 J2.2 J2.3 J2.5 J2.11 J2.14 J2.16 J2.17 J2.18 J2.19 J2.20 J4.2 J4.4 J4.6 U1.4 U1.9 U1.11 U2.9 U4.1 U5.11 U5.15 U5.19 U5.23 U5.25 U5.26 U5.27 U5.29 U5.36 U5.37 U5.38 U5.40 U5.47 U5.49 U5.50 U5.52 U5.53 U5.57 U5.58 U5.59 U5.60 U5.61 U5.62 U5.64 U5.65 U5.66 U6.13 U6.14 U6.15 U6.16 U6.17 U6.19 U6.20 U6.24 U6.25 U8.1 U8.4 U8.7 U8.8 U8.10 U8.11 U9.4 U11.4 U12.4 U12.5 U12.6 U12.11 U12.12 U12.13

## Polygon pours and split planes (outlines as drawn)
GND on Top Layer "GND_L01_P061" (solid, pour order 61): 31.65,113.6 31.65,56.6 33.45,54.8 114.95,54.8 114.95,114.6 113.35,116.2 57.35,116.2
NetL3_2 on Top Layer "NETL3_2_L01_P060" (solid, pour order 60): 59.4,88.45 59.4,90.6 60.25,90.6 60.25,89.7 59.8,89.7 59.7,89.6 59.7,88.45
NetL3_1 on Top Layer "NETL3_1_L01_P059" (solid, pour order 59): 58.7,88.45 58.7,90.6 57.75,90.6 57.75,89.7 58.35,89.7 58.4,89.65 58.4,88.45
3V3_MCU on Top Layer "3V3_MCU_L01_P058" (solid, pour order 58): 59.9,89.25 60.2,89.25 60.55,89.6 60.95,89.6 60.95,88.3 60.3,88.3 60.2,88.4 59.9,88.4
1V8_A on Top Layer "1V8_A_L01_P055" (solid, pour order 55): 60.9,72.35 62.85,72.35 62.95,72.25 62.95,71.3 62.85,71.2 61.65,71.2
1V8_D on Top Layer "1V8_D_L01_P053" (solid, pour order 53): 63.05,78.45 66.85,74.65 69.9,74.65 69.9,73.65 66.45,73.65 62.85,77.25 60.9,77.25 60.9,78.4 60.85,78.45
1V8_D on Top Layer "1V8_D_L01_P052" (solid, pour order 52): 62.25,78.45 62.25,77.25 60.85,77.25 60.55,77.55 59.3,77.55 59.3,78.2 60.6,78.2 60.85,78.45
1V8_A on Top Layer "1V8_A_L01_P051" (solid, pour order 51): 59.35,71.5 60.65,71.5 60.9,71.25 60.9,71.15 62.25,71.15 62.3,71.2 62.3,72.35 60.9,72.35 60.7,72.15 59.35,72.15
3V3_MCU on Top Layer "3V3_MCU_L01_P050" (solid, pour order 50): 90.25,108.85 90.75,108.35 90.75,105.3 91.65,105.3 91.65,108.25 92.05,108.65 94.1,108.65 94.1,109.3 91.95,109.3 91.25,110 91.25,111.4 90.25,111.4
3V3_MCU on Top Layer "3V3_MCU_L01_P047" (solid, pour order 47): 84.55,78.4 84.55,78.05 84.05,77.55 83.3,77.55 83.15,77.4 83.15,76.25 83.25,76.15 85.05,76.15 85.05,77.15 84.85,77.35 84.85,78.4
3V3_MCU on Top Layer "3V3_MCU_L01_P034" (solid, pour order 34): 61.6,83.95 67.7,83.95 68.05,84.3 68.05,85.05 68.45,85.45 69.15,85.45 69.15,86.05 69.1,86 67.05,86 67.05,84.9 66.75,84.6 62.8,84.6 62.55,84.85 62.5,84.8 61.75,84.8
3V3_MCU on Top Layer "3V3_MCU_L01_P045" (solid, pour order 45): 71.25,86.7 70.05,86.7 69.4,86.05 68.4,86.05 68.35,86 68.35,85.45 69.35,85.45 70,86.1 71.25,86.1
3V3_MCU on Top Layer "3V3_MCU_L01_P041" (solid, pour order 41): 73.15,72.3 73.15,73.9 73.9,74.65 74.9,74.65 74.9,73.25 74.65,73 74.35,73 74.05,73.3 73.55,73.3 73.45,73.2 73.45,72.3
3V3_MCU on Top Layer "3V3_MCU_L01_P040" (solid, pour order 40): 77.75,83.65 77.75,80.4 77.95,80.2 79.6,80.2 79.75,80.35 79.75,80.65 79.4,81 79.4,82 79.8,82.4 80.05,82.4 80.05,83 79.15,83.9 78.05,83.9 78.05,83.65
BAT+ on Top Layer "BAT+_L01_P031" (solid, pour order 31): 50.75,103.7 50.75,102.35 51,102.1 51,101.25 50.05,101.25 49.95,101.15 49.95,98.55 48,98.55 47,99.55 39.45,99.55 37.85,97.95 37.85,97.05 37.05,97.05 37.05,98.516 39.234,100.7 46.75,100.7 49.75,103.7
BAT- on Top Layer "BAT-_L01_P030" (solid, pour order 30): 37.05,96.45 37.05,95.85 37.25,95.65 40.95,95.65 40.95,96.35 38.15,96.35 37.9,96.6 37.2,96.6
AC2 on Top Layer "AC2_L01_P029" (solid, pour order 29): 46.4,79.9 43.85,79.9 43.05,80.7 39.4,80.7 37.65,78.95 37.65,77.4 37.8,77.25 37.5,76.95 37.5,76.6 36.7,76.6 36.2,77.1 36.2,77.25 36.5,77.55 36.5,79.7 38.55,81.75 46.05,81.75 46.4,81.4
AC2 on Top Layer "AC2_L01_P028" (solid, pour order 28): 43.15,77.1 43.15,76.55 42.45,76.55 41.9,76 41.9,75 40.6,75 40.45,74.85 39.8,74.85 38.85,75.8 33.6,75.8 33.6,77.25 42.15,77.25 42.25,77.1
AC1 on Top Layer "AC1_L01_P027" (solid, pour order 27): 46.3,70.4 45.55,69.65 40.6,69.65 40.25,69.3 39.85,69.3 39.85,71.85 40,72 40.6,71.4 43.45,71.4 43.45,70.7 43.7,70.45 44.55,70.45 44.75,70.65 44.75,71.4 46.3,71.4
AC1 on Top Layer "AC1_L01_P026" (solid, pour order 26): 39.25,69.3 39.25,74 39.8,74.55 41.7,74.55 42.4,73.85 43.15,73.85 43.2,73.8 43.2,73.25 42.85,72.9 40.8,72.9 40.25,72.35 40.25,69.3
NetC61_1 on Top Layer "NETC61_1_L01_P025" (solid, pour order 25): 33.6,74.15 33.6,73.65 34.05,73.2 36.9,73.2 37.6,72.5 37.6,69.3 38.6,69.3 38.6,73.65 37.5,74.75 34,74.75
NetC8_2 on Top Layer "NETC8_2_L01_P024" (solid, pour order 24): 43.65,76.55 43.65,77.95 43.55,78.05 42.9,78.05 42.45,78.5 42.45,78.6 39.85,78.6 39.85,77.65 42.45,77.65 42.65,77.45 43.3,77.45 43.4,77.35 43.4,76.55
BAT on Top Layer "BAT_L01_P021" (solid, pour order 21): 44.3,69.25 45.3,69.25 45.7,68.85 46.4,68.85 46.4,68.05 46.65,67.8 52.1,67.8 52.9,68.6 52.9,73.25 54.3,73.25 54.65,72.9 54.65,71.3 54.5,71.15 54.5,68.1 52.95,66.55 44.65,66.55 44.3,66.9
BAT on Top Layer "BAT_L01_P017" (solid, pour order 17): 52.9,89.45 52.9,77.7 53.35,77.25 56.05,77.25 56.4,77.6 57.6,77.6 57.6,78.2 57.8,78.4 57.8,80.4 54.65,81.55 54.65,87.05 55,87.4 55,89.45
BAT on Top Layer "BAT_L01_P018" (solid, pour order 18): 52.9,77.7 52.9,73.15 55.15,70.9 56.15,70.9 56.15,71.05 56.6,71.5 57.7,71.5 57.7,72.15 57.85,72.3 57.85,74.3 55.2,74.3 54.587,74.913 54.587,77.087 54.8,77.3 54.55,77.55 54.55,78.2
BAT on Top Layer "BAT_L01_P015" (solid, pour order 15): 50.4,91.15 50.55,91.15 50.7,91 54.3,91 55.6,89.7 56.6,89.7 57.05,89.25 58.2,89.25 58.2,88.4 56.95,88.4 56.65,88.1 56.65,87.1 55.25,87.1 52.9,89.45 52.9,90.35 50.85,90.35 50.7,90.2 50.6,90.3 50.2,90.3
BAT on Top Layer "BAT_L01_P012" (solid, pour order 12): 48.3,89.3 48.3,90 48.7,90.4 48.7,94.3 48,95 48,96.75 48.05,96.8 50,96.8 50.6,96.2 50.55,96.15 50.55,90.75 51.2,90.1 51.2,89.45 51.15,89.4 49.7,89.4 49.6,89.3
NetC5_2 on Top Layer "NETC5_2_L01_P010" (solid, pour order 10): 39.55,87.4 39.5,87.45 39.5,89.3 40.65,89.3 40.65,87.45 40.6,87.4
3V3_MCU on Top Layer "3V3_MCU_L01_P009" (solid, pour order 9): 59.9,86.3 59.9,84 59.95,83.95 62.55,83.95 62.55,85.25 62.25,85.55 60.315,85.55 60.2,85.8 60.2,86.3
5V_IN on Top Layer "5V_IN_L01_P004" (solid, pour order 4): 40.85,89.8 40.85,89.25 40.9,89.2 40.9,89.15 42.4,89.15 42.6,88.95 42.6,88.85 42.65,88.8 43.65,88.8 43.75,88.9 43.75,89.15 43.9,89.3 45.15,89.3 45.2,89.35 45.2,89.7 45,89.9 40.95,89.9
NetC5_2 on Top Layer "NETC5_2_L01_P001" (solid, pour order 1): 36,91 37.5,91 37.95,91.45 41.45,91.45 41.5,91.4 41.5,90.5 41.45,90.45 40.75,90.45 40.65,90.35 40.65,89.2 40.6,89.15 39.6,89.15 39.5,89.25 39.5,89.8 38.7,90.6 36,90.6
GND on Bottom Layer 1 "GND_L04_P062" (solid, pour order 62): 31.65,115.05 31.55,114.95 31.55,55.35 113.35,55.35 115.7,57.7 115.7,114.75
1V8_A on Bottom Layer 1 "1V8_A_L04_P054" (solid, pour order 54): 62.35,72.4 66.35,72.4 68.65,70.1 68.65,69.05 67.65,69.05 67.65,70.05 65.95,71.75 63.2,71.75 62.7,71.25 62.7,71.2 62.35,71.2
3V3_MCU on Bottom Layer 1 "3V3_MCU_L04_P049" (solid, pour order 49): 78.2,93 79.1,93 90.65,104.55 90.65,107.45 90.85,107.65 91.7,107.65 91.9,107.45 91.85,107.4 91.85,103.05 80.65,91.85 80.65,91.5 80.45,91.3 79.7,92.05 78.9,92.05
3V3_MCU on Bottom Layer 1 "3V3_MCU_L04_P046" (solid, pour order 46): 77.9,80.2 77.9,76.7 78.35,76.25 83.6,76.25 83.75,76.4 83.75,77.4 83.6,77.55 79.5,77.55 79.05,78 79.05,80.05 79.25,80.25 78.7,80.8 78.2,80.8
3V3_MCU on Bottom Layer 1 "3V3_MCU_L04_P036" (solid, pour order 36): 73.25,93 79.1,93 80.65,91.45 80.65,89.6 80.05,89 79.5,89 79.5,91.25 79.15,91.6 73.25,91.6
3V3_MCU on Bottom Layer 1 "3V3_MCU_L04_P042" (solid, pour order 42): 73.55,81.6 74.05,81.1 74.05,74.9 73.15,74 73.15,73.3 73.5,72.95 74.6,72.95 74.9,73.25 74.9,81 75.55,81.65 75.15,82.05 73.65,82.05
3V3_MCU on Bottom Layer 1 "3V3_MCU_L04_P033" (solid, pour order 33): 60.3,89.35 63.45,92.5 73.55,92.5 73.7,92.35 73.7,91.8 73.5,91.6 64.2,91.6 61.4,88.8 61.4,86 61.7,85.7 62.3,85.7 62.55,85.45 62.55,85.15 62.35,84.95 60.4,84.95 60.3,85.05
3V3_MCU on Bottom Layer 1 "3V3_MCU_L04_P035" (solid, pour order 35): 60.3,85.55 60.3,85.15 60.4,85.05 60.4,82 60.8,81.6 76.5,81.6 77.9,80.2 79.6,80.2 80.1,80.7 80.1,83 79.45,83 78.9,82.45 63,82.45 62.55,82.9 62.55,85.55
BAT on Bottom Layer 1 "BAT_L04_P022" (solid, pour order 22): 43.85,72.45 43.85,68.05 44.35,67.55 46.3,67.55 46.45,67.7 46.45,68 44.35,70.1 44.35,72.5 44.35,73.85 43.8,73.85
GND on Inner Layer 1 "GND_L02_P056" (solid, pour order 56): 32.45,112.75 32.45,56.7 33.25,55.9 33.65,56.3 114.6,56.3 114.6,113.9 115.7,115 114.6,116.1 31.7,116.1

## Keep-outs
Keep-Out Layer:
  the board outline again, w0.2

## Other copper
Top Layer:
  pour cut-out: 42.65,99.5 47,99.5 47.85,98.65 47.05,97.85 47.05,96.3 46.4,96.3 44.65,94.55 41.2,94.55 40.85,94.9 41,95.05 41,97.15 42.1,98.25 42.1,99.35
  pour cut-out: 41.5,98.75 41.5,98.5 41.4,98.4 41,98.4 41,95.55 41.45,95.55 41.45,95.4 41.7,95.15 43.7,95.15 43.7,95.85 43.55,96 43.55,96.2 43.5,96.2 42.75,96.95 42.75,98.5 42.45,98.8 41.7,98.8 41.55,98.65
  pour cut-out: 82.25,85.9 83.45,85.9 88,90.45 94.8,90.45 103.3,98.95 102.6,99.65 94.4,99.65 90.9,96.15 90.85,96.2 79.4,96.2 79.4,96.1 76.25,92.95 76.25,90.8 76.75,90.8 77.45,90.1
  pour cut-out: 75.9,82.8 77.4,82.8 77.45,82.75 77.45,80.15 78.85,78.75 84.35,78.75 84.35,74.3 84.2,74.15 84.05,74.3 81.05,74.3 81.05,75 75.05,81 75.05,81.2
  pour cut-out: 72.25,81.7 72.25,80.45 72.6,80.1 74.1,80.1 74.1,80.05 81.4,72.75 106.85,72.75 106.75,72.85 106.75,79.15 104.55,79.15 100,74.6 82.25,74.6 75.9,80.95 75.9,82.65 75.75,82.8 72.7,82.8
  pour cut-out: 70.2,102.25 70.2,101.7 72.05,99.85 72.05,91.5 72.15,91.4 73.35,91.4 73.35,100.8 71.75,102.4 70.3,102.4
  pour cut-out: 70.2,107 71.7,107 71.7,105.85 71.95,105.6 71.95,104 71.6,103.65 71.65,103.6 71.65,102.1 70.5,102.1 70.35,102.25 70.2,102.25
  pour cut-out: 64.4,107.75 65.65,107.75 66.5,106.9 67.95,106.9 67.95,105.65 68,105.6 65.55,105.6 64.75,106.4 64.3,106.4 64.3,107.75 64.35,107.8

## Silkscreen, mask and mechanical layers (free items; w line width, h text height)
Top Overlay:
  text "RF out" at 68.054,109.804 h1
  text "RX" at 81.196,100.704 h1 r90
  text "TX" at 86.346,100.604 h1 r90
  text "Battery" at 33.304,99.887 h1
  text "UART" at 81.554,98.204 h1
  text "GND" at 65.804,97.254 h1
  text "MCU Reset" at 94.646,81.104 h1 r90
  text "Segger J-link SWDIO" at 99.863,75.704 h1 r90
  text "GND" at 96.004,69.304 h1
  text "Wireless / Charger" at 36.5,64.75 h1 r90
Board Outline:
  the board outline again, w0.01

## Text inside footprints (layer, text, board x,y; h text height)
J1: Board Outline "Board Edge" at 32.095,91.067 h0.3 r270